# Altium PCB 7DIG.PcbDoc
Units mm, origin at the board's own origin, x right, y up, seen from the top; angles counter-clockwise.
Board outline 65 x 100 mm, 2 copper layers (Top Layer, Bottom Layer); 36 components, 28 nets, 72 pads, 0 vias.
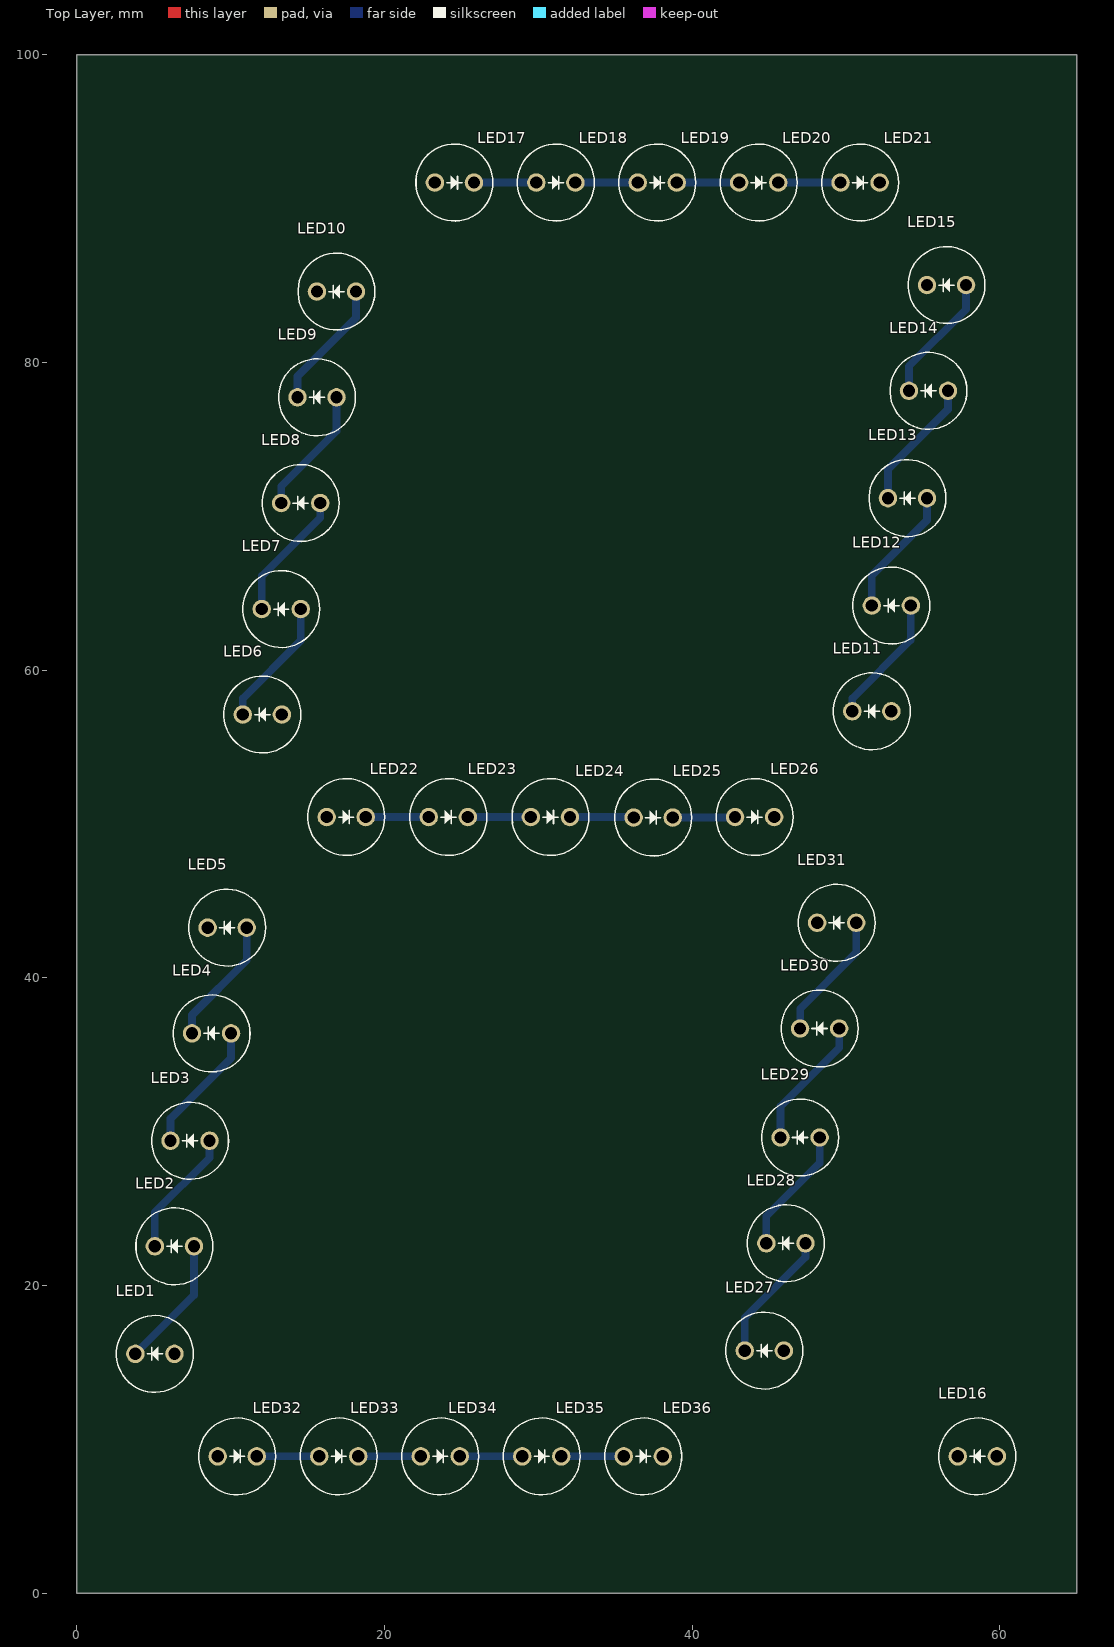
[diagram p0: Top Layer view]
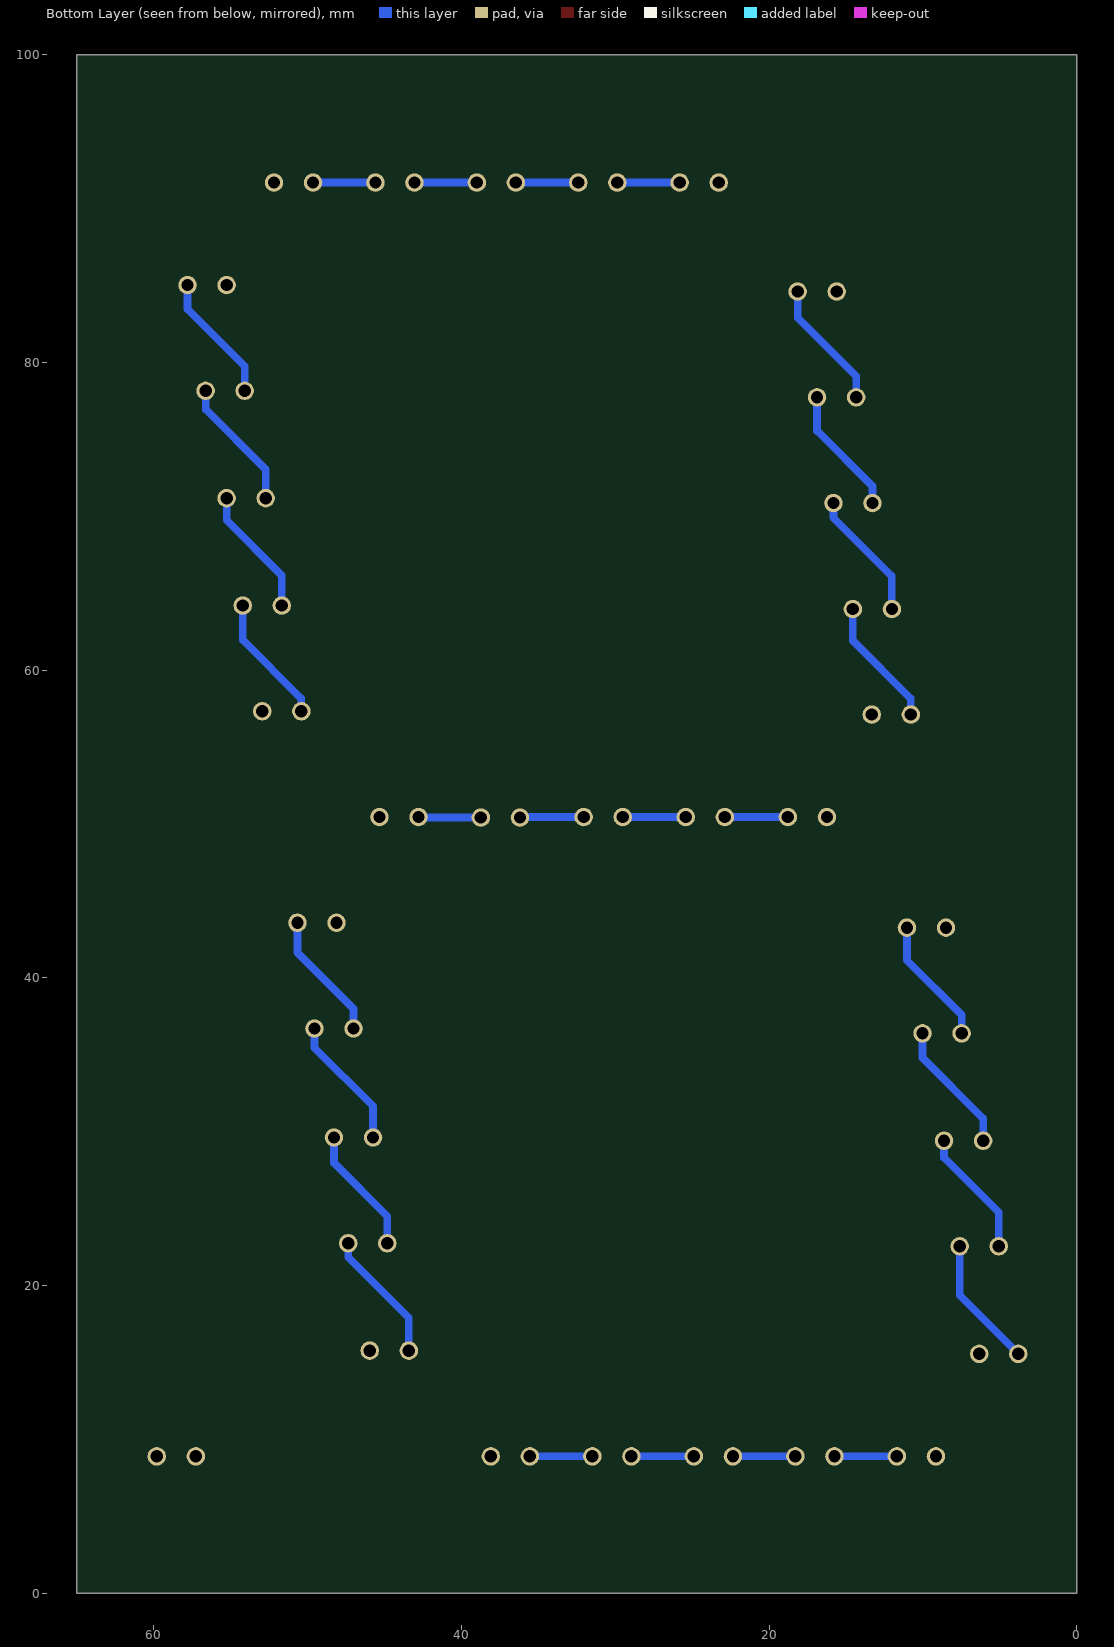
[diagram p1: Bottom Layer view, seen from below]
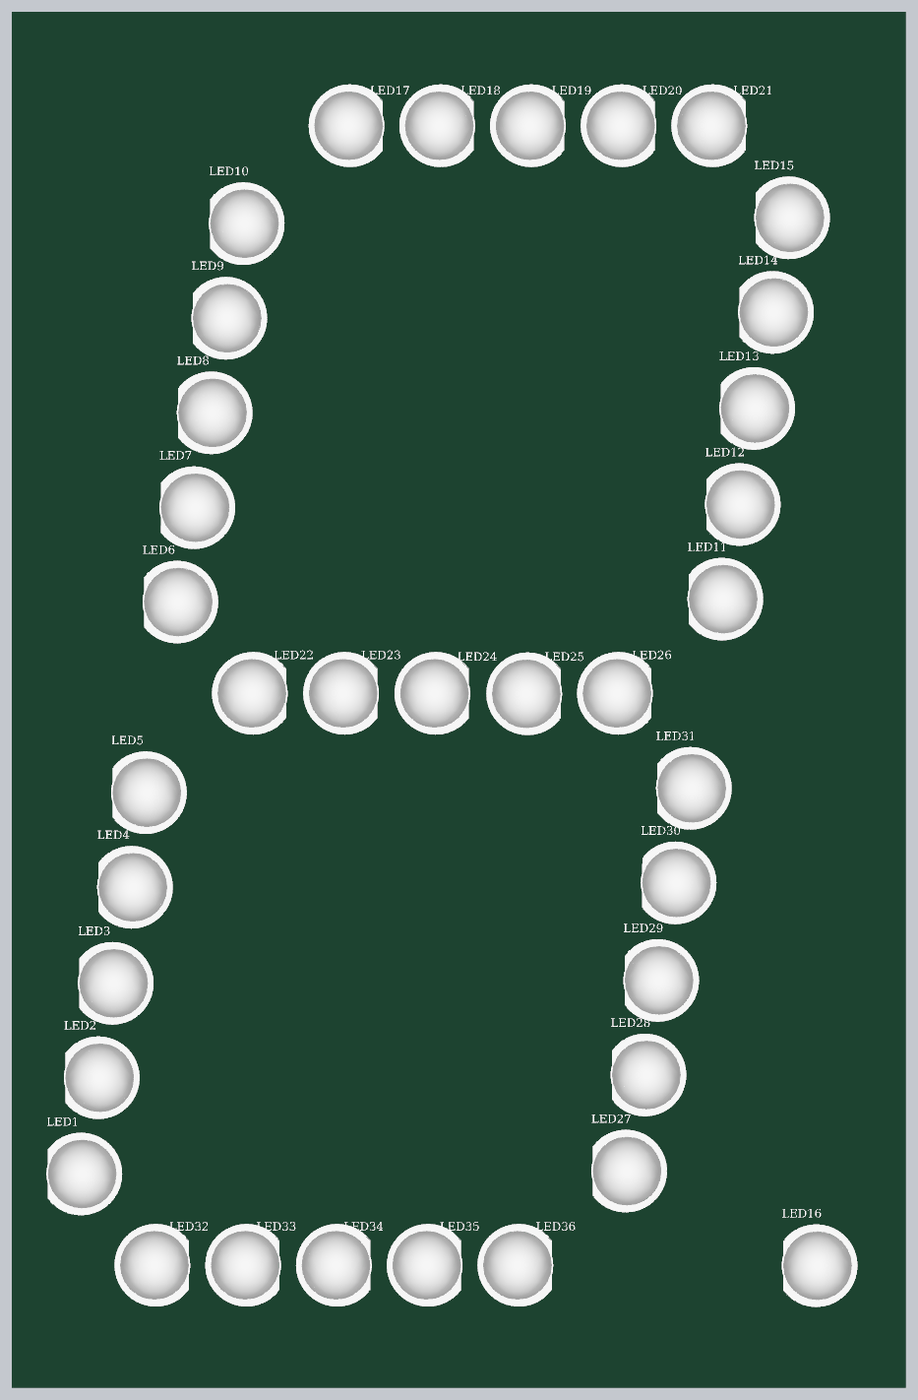
[diagram p2: 3D render of the assembled board from above, using the file's embedded part models]

## Layer stack, top to bottom
Top Solder: solder mask 0.0102, Solder Resist, Dk 3.5
Top Layer: signal copper 0.0356
Dielectric 1: dielectric 0.32, FR-4, Dk 4.8
Bottom Layer: signal copper 0.0356
Bottom Solder: solder mask 0.0102, Solder Resist, Dk 3.5

## Board outline
0,0 65,0 65,100 0,100

## Design rules (kind name [scope] priority, off if disabled: settings)
Clearance [All] p1: gap=0.35
PolygonConnect [All] p1: connectstyle=Relief reliefconductorwidth=0.254 reliefentries=4 polygonreliefangle="90 Angle" airgapwidth=0.254
RoutingVias [All] p1: holewidth=0.711 width=1.27 viastyle="Through Hole" minholewidth=0.711 minwidth=1.27 maxholewidth=0.711 maxwidth=1.27
SolderMaskExpansion [All] p1: expansion=0.102
Width [All] p1: maxlimit=4 minlimit=0.254 preferedwidth=0.254
30 further rules are at their usual default settings.

## Components (designator, comment, footprint, x,y, rotation, side; value= is the part's Value field where it differs from the comment)
LED1 "LED TH 5MM AZ" "LED 5MM" 5.07,15.553 r0 top
LED2 "LED TH 5MM AZ" "LED 5MM" 6.34,22.548 r0 top
LED3 "LED TH 5MM AZ" "LED 5MM" 7.356,29.407 r0 top
LED4 "LED TH 5MM AZ" "LED 5MM" 8.753,36.387 r0 top
LED5 "LED TH 5MM AZ" "LED 5MM" 9.769,43.262 r0 top
LED6 "LED TH 5MM AZ" "LED 5MM" 12.055,57.116 r0 top
LED7 "LED TH 5MM AZ" "LED 5MM" 13.286,63.972 r0 top
LED8 "LED TH 5MM AZ" "LED 5MM" 14.549,70.865 r0 top
LED9 "LED TH 5MM AZ" "LED 5MM" 15.611,77.739 r0 top
LED10 "LED TH 5MM AZ" "LED 5MM" 16.875,84.614 r0 top
LED11 "LED TH 5MM AZ" "LED 5MM" 51.679,57.328 r0 top
LED12 "LED TH 5MM AZ" "LED 5MM" 52.949,64.202 r0 top
LED13 "LED TH 5MM AZ" "LED 5MM" 53.997,71.182 r0 top
LED14 "LED TH 5MM AZ" "LED 5MM" 55.362,78.162 r0 top
LED15 "LED TH 5MM AZ" "LED 5MM" 56.535,85.037 r0 top
LED16 "LED TH 5MM AZ" "LED 5MM" 58.537,8.89 r0 top
LED17 "LED TH 5MM AZ" "LED 5MM" 24.543,91.699 r180 top
LED18 "LED TH 5MM AZ" "LED 5MM" 31.136,91.699 r180 top
LED19 "LED TH 5MM AZ" "LED 5MM" 37.73,91.699 r180 top
LED20 "LED TH 5MM AZ" "LED 5MM" 44.323,91.699 r180 top
LED21 "LED TH 5MM AZ" "LED 5MM" 50.917,91.699 r180 top
LED22 "LED TH 5MM AZ" "LED 5MM" 17.51,50.453 r180 top
LED23 "LED TH 5MM AZ" "LED 5MM" 24.147,50.453 r180 top
LED24 "LED TH 5MM AZ" "LED 5MM" 30.784,50.453 r180 top
LED25 "LED TH 5MM AZ" "LED 5MM" 37.465,50.419 r180 top
LED26 "LED TH 5MM AZ" "LED 5MM" 44.059,50.453 r180 top
LED27 "LED TH 5MM AZ" "LED 5MM" 44.69,15.764 r0 top
LED28 "LED TH 5MM AZ" "LED 5MM" 46.091,22.744 r0 top
LED29 "LED TH 5MM AZ" "LED 5MM" 47.017,29.619 r0 top
LED30 "LED TH 5MM AZ" "LED 5MM" 48.286,36.705 r0 top
LED31 "LED TH 5MM AZ" "LED 5MM" 49.393,43.579 r0 top
LED32 "LED TH 5MM AZ" "LED 5MM" 10.424,8.89 r180 top
LED33 "LED TH 5MM AZ" "LED 5MM" 17.023,8.89 r180 top
LED34 "LED TH 5MM AZ" "LED 5MM" 23.622,8.89 r180 top
LED35 "LED TH 5MM AZ" "LED 5MM" 30.221,8.89 r180 top
LED36 "LED TH 5MM AZ" "LED 5MM" 36.82,8.89 r180 top

## Footprints (in the part's own frame and the unit in brackets; to place one, negate y for a bottom-side part, rotate by r counter-clockwise, add the part's x,y. Pads: shape width x height; smd on the part's side, far side on the other; paste and mask are expansions set on the pad)
"LED 5MM" [mm] "LED Radial Through Hole,  5.1mm X 3.7mm, Pitch 2.54mm"
  round 1.2 hole 0.8: 1(1.27,0) 2(-1.27,0)
  silkscreen extent -2.5,-2.5 2.5,2.5, body extent -2.46,-3.02 2.96,2.99, height 12.31

## Part data
LED1 LED2 LED3 LED4 LED5 LED6 LED7 LED8 LED9 LED10 LED11 LED12 LED13 LED14 LED15 LED16 LED17 LED18 LED19 LED20 LED21 LED22 LED23 LED24 LED25 LED26 LED27 LED28 LED29 LED30 LED31 LED32 LED33 LED34 LED35 LED36: "LED"

## Nets (pads, with @x,y where several pads share a name; then routed paths per layer and width w, separated by ;. In a path a pad name is that pad's centre, name@x,y a point inside that pad or via, vN(x,y) a via of type N, cw(c..) or ccw(c..) an arc to the next point about the centre after c; other vN are vias at no path point)
NetLED1_2: LED1.2 LED2.1 | length 8.6
  Bottom Layer w0.5: LED1.2 7.61,19.363 LED2.1
NetLED2_2: LED2.2 LED3.1 | length 8.3
  Bottom Layer w0.5: LED2.2 5.07,24.755 8.626,28.311 LED3.1
NetLED3_2: LED3.2 LED4.1 | length 8.6
  Bottom Layer w0.5: LED3.2 6.086,30.851 10.023,34.788 LED4.1
NetLED4_2: LED4.2 LED5.1 | length 8.3
  Bottom Layer w0.5: LED4.2 7.483,37.582 11.039,41.138 LED5.1
NetLED6_2: LED6.2 LED7.1 | length 8.4
  Bottom Layer w0.5: LED6.2 10.785,58.156 14.556,61.927 LED7.1
NetLED7_2: LED7.2 LED8.1 | length 8.5
  Bottom Layer w0.5: LED7.2 12.016,66.118 15.819,69.921 LED8.1
NetLED8_2: LED8.2 LED9.1 | length 8.4
  Bottom Layer w0.5: LED8.2 13.279,71.953 16.881,75.555 LED9.1
NetLED9_2: LED9.2 LED10.1 | length 8.5
  Bottom Layer w0.5: LED9.2 14.341,79.111 18.145,82.915 LED10.1
NetLED11_2: LED11.2 LED12.1 | length 8.5
  Bottom Layer w0.5: LED11.2 50.409,58.156 54.219,61.966 LED12.1
NetLED12_2: LED12.2 LED13.1 | length 8.5
  Bottom Layer w0.5: LED12.2 51.679,66.157 55.267,69.745 LED13.1
NetLED13_2: LED13.2 LED14.1 | length 8.6
  Bottom Layer w0.5: LED13.2 52.727,73.047 56.632,76.952 LED14.1
NetLED14_2: LED14.2 LED15.1 | length 8.4
  Bottom Layer w0.5: LED14.2 54.092,79.746 57.805,83.459 LED15.1
NetLED17_2: LED17.2 LED18.1 | length 4.1
  Bottom Layer w0.5: LED17.2 LED18.1
NetLED18_2: LED18.2 LED19.1 | length 4.1
  Bottom Layer w0.5: LED18.2 LED19.1
NetLED19_2: LED19.2 LED20.1 | length 4.1
  Bottom Layer w0.5: LED19.2 LED20.1
NetLED20_2: LED20.2 LED21.1 | length 4.1
  Bottom Layer w0.5: LED20.2 LED21.1
NetLED22_2: LED22.2 LED23.1 | length 4.1
  Bottom Layer w0.5: LED22.2 LED23.1
NetLED23_2: LED23.2 LED24.1 | length 4.1
  Bottom Layer w0.5: LED23.2 LED24.1
NetLED24_2: LED24.2 LED25.1 | length 4.2
  Bottom Layer w0.5: LED24.2 LED25.1@36.229,50.453
NetLED25_2: LED25.2 LED26.1 | length 4
  Bottom Layer w0.5: LED25.2 LED26.1@42.755,50.419
NetLED27_2: LED27.2 LED28.1 | length 8.6
  Bottom Layer w0.5: LED27.2 43.42,17.893 47.361,21.834 LED28.1
NetLED28_2: LED28.2 LED29.1 | length 8.3
  Bottom Layer w0.5: LED28.2 44.821,24.501 48.287,27.967 LED29.1
NetLED29_2: LED29.2 LED30.1 | length 8.7
  Bottom Layer w0.5: LED29.2 45.747,31.65 49.556,35.459 LED30.1
NetLED30_2: LED30.2 LED31.1 | length 8.4
  Bottom Layer w0.5: LED30.2 47.016,37.999 50.663,41.646 LED31.1
NetLED32_2: LED32.2 LED33.1 | length 4.1
  Bottom Layer w0.5: LED32.2 LED33.1
NetLED33_2: LED33.2 LED34.1 | length 4.1
  Bottom Layer w0.5: LED33.2 LED34.1
NetLED34_2: LED34.2 LED35.1 | length 4.1
  Bottom Layer w0.5: LED34.2 LED35.1
NetLED35_2: LED35.2 LED36.1 | length 4.1
  Bottom Layer w0.5: LED35.2 LED36.1
pads on no net: LED1.1 LED5.2 LED6.1 LED10.2 LED11.1 LED15.2 LED16.1 LED16.2 LED17.1 LED21.2 LED22.1 LED26.2 LED27.1 LED31.2 LED32.1 LED36.2

## Silkscreen, mask and mechanical layers (free items; w line width, h text height)
Mechanical 29:
  the board outline again, w0.1